# Altium PCB Carrier_I.PcbDoc
Units mm, origin at the board's own origin, x right, y up, seen from the top; angles counter-clockwise.
Board outline 90 x 90 mm, 2 copper layers (Top Layer, Bottom Layer); 8 components, 0 nets, 224 pads, 112 vias.
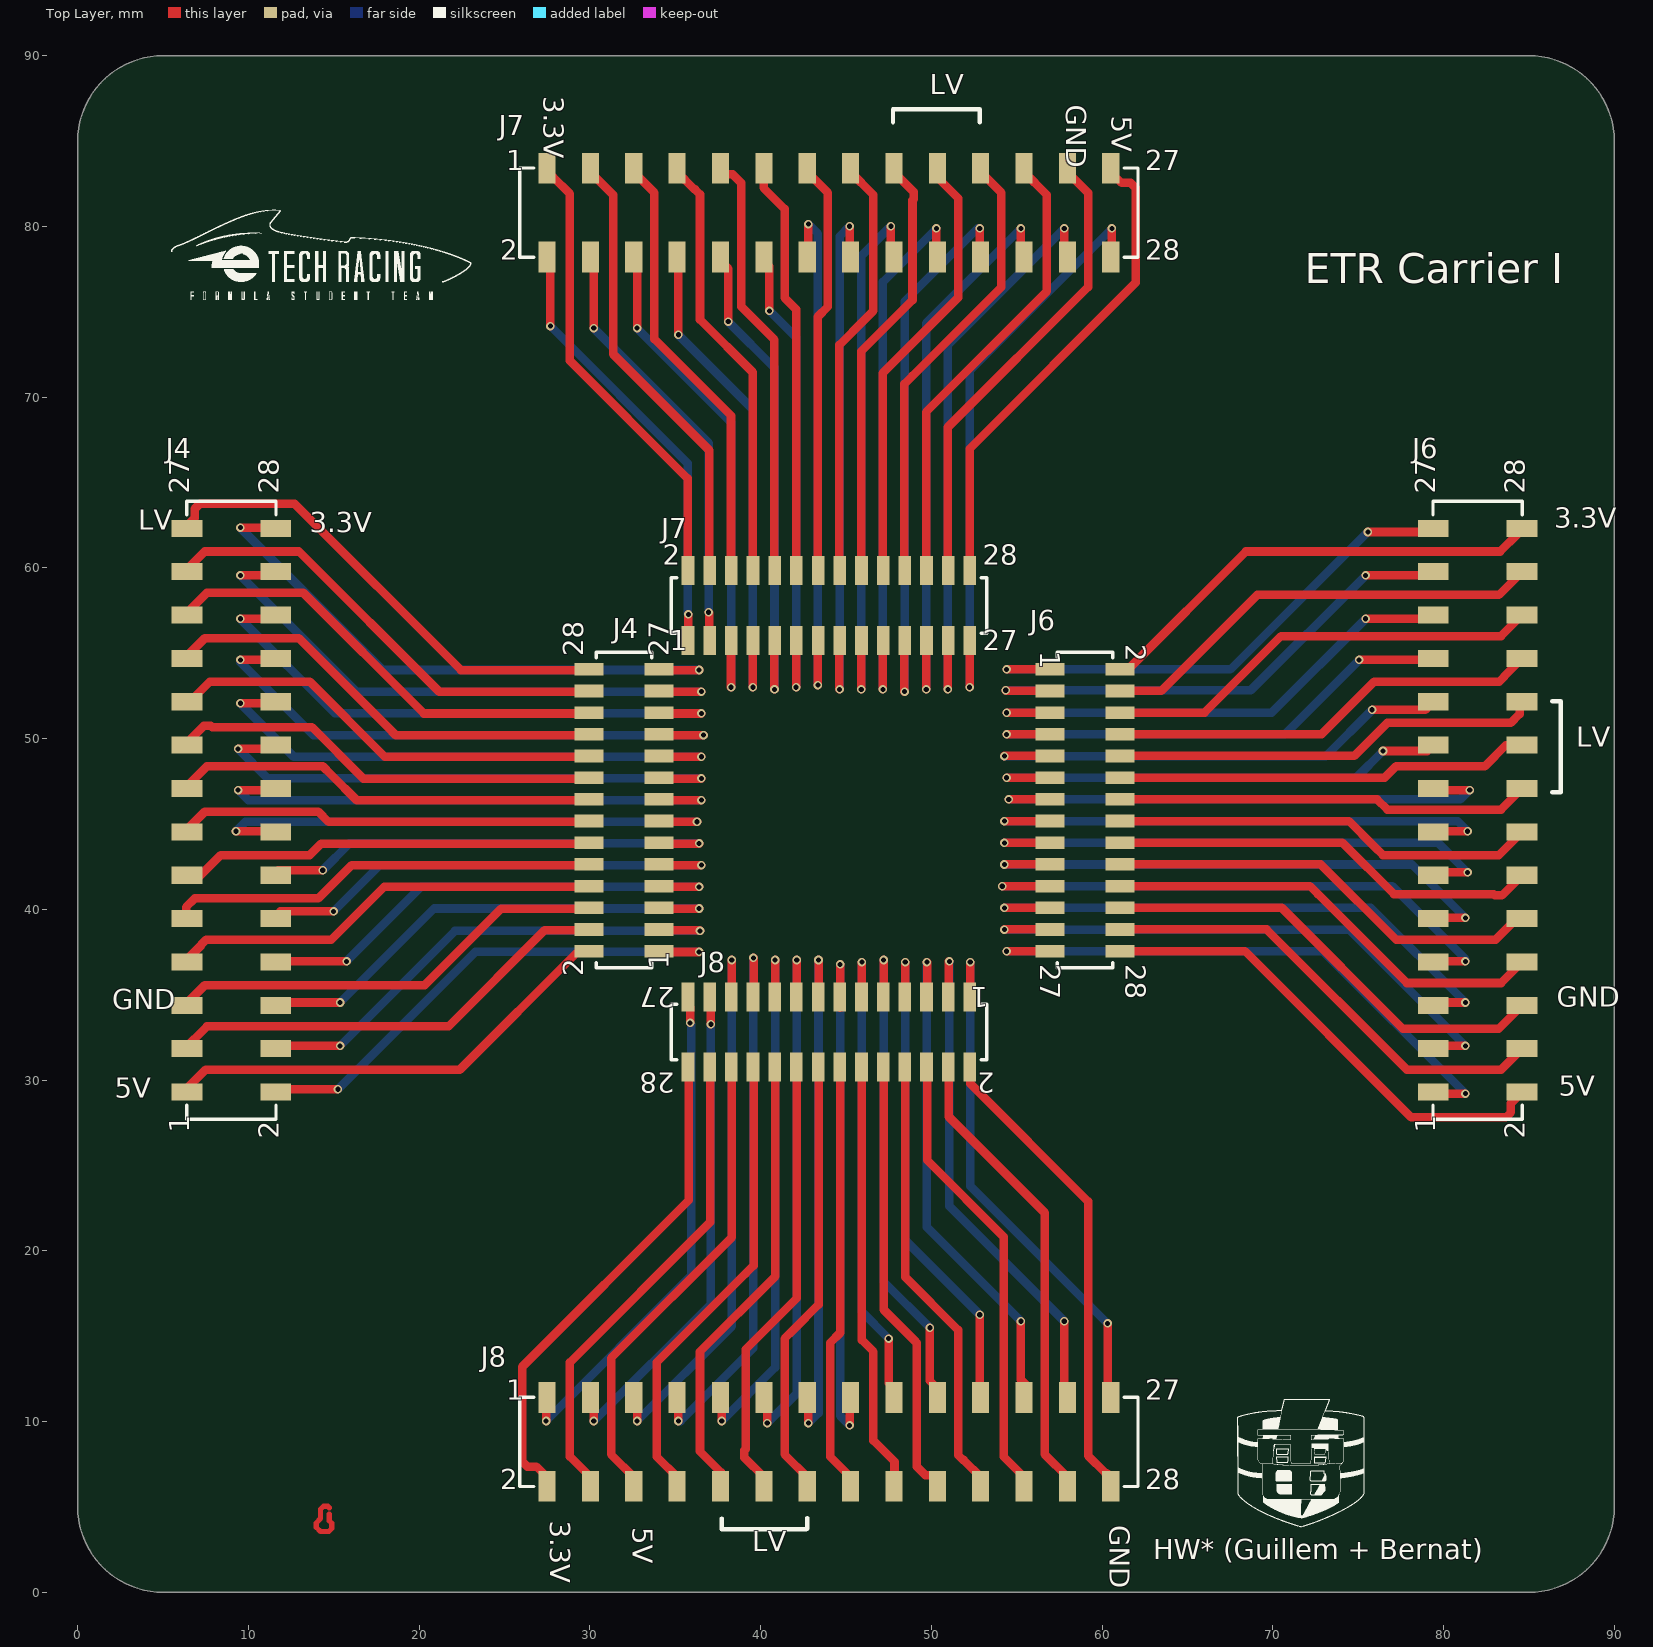
[diagram p0: Top Layer view]
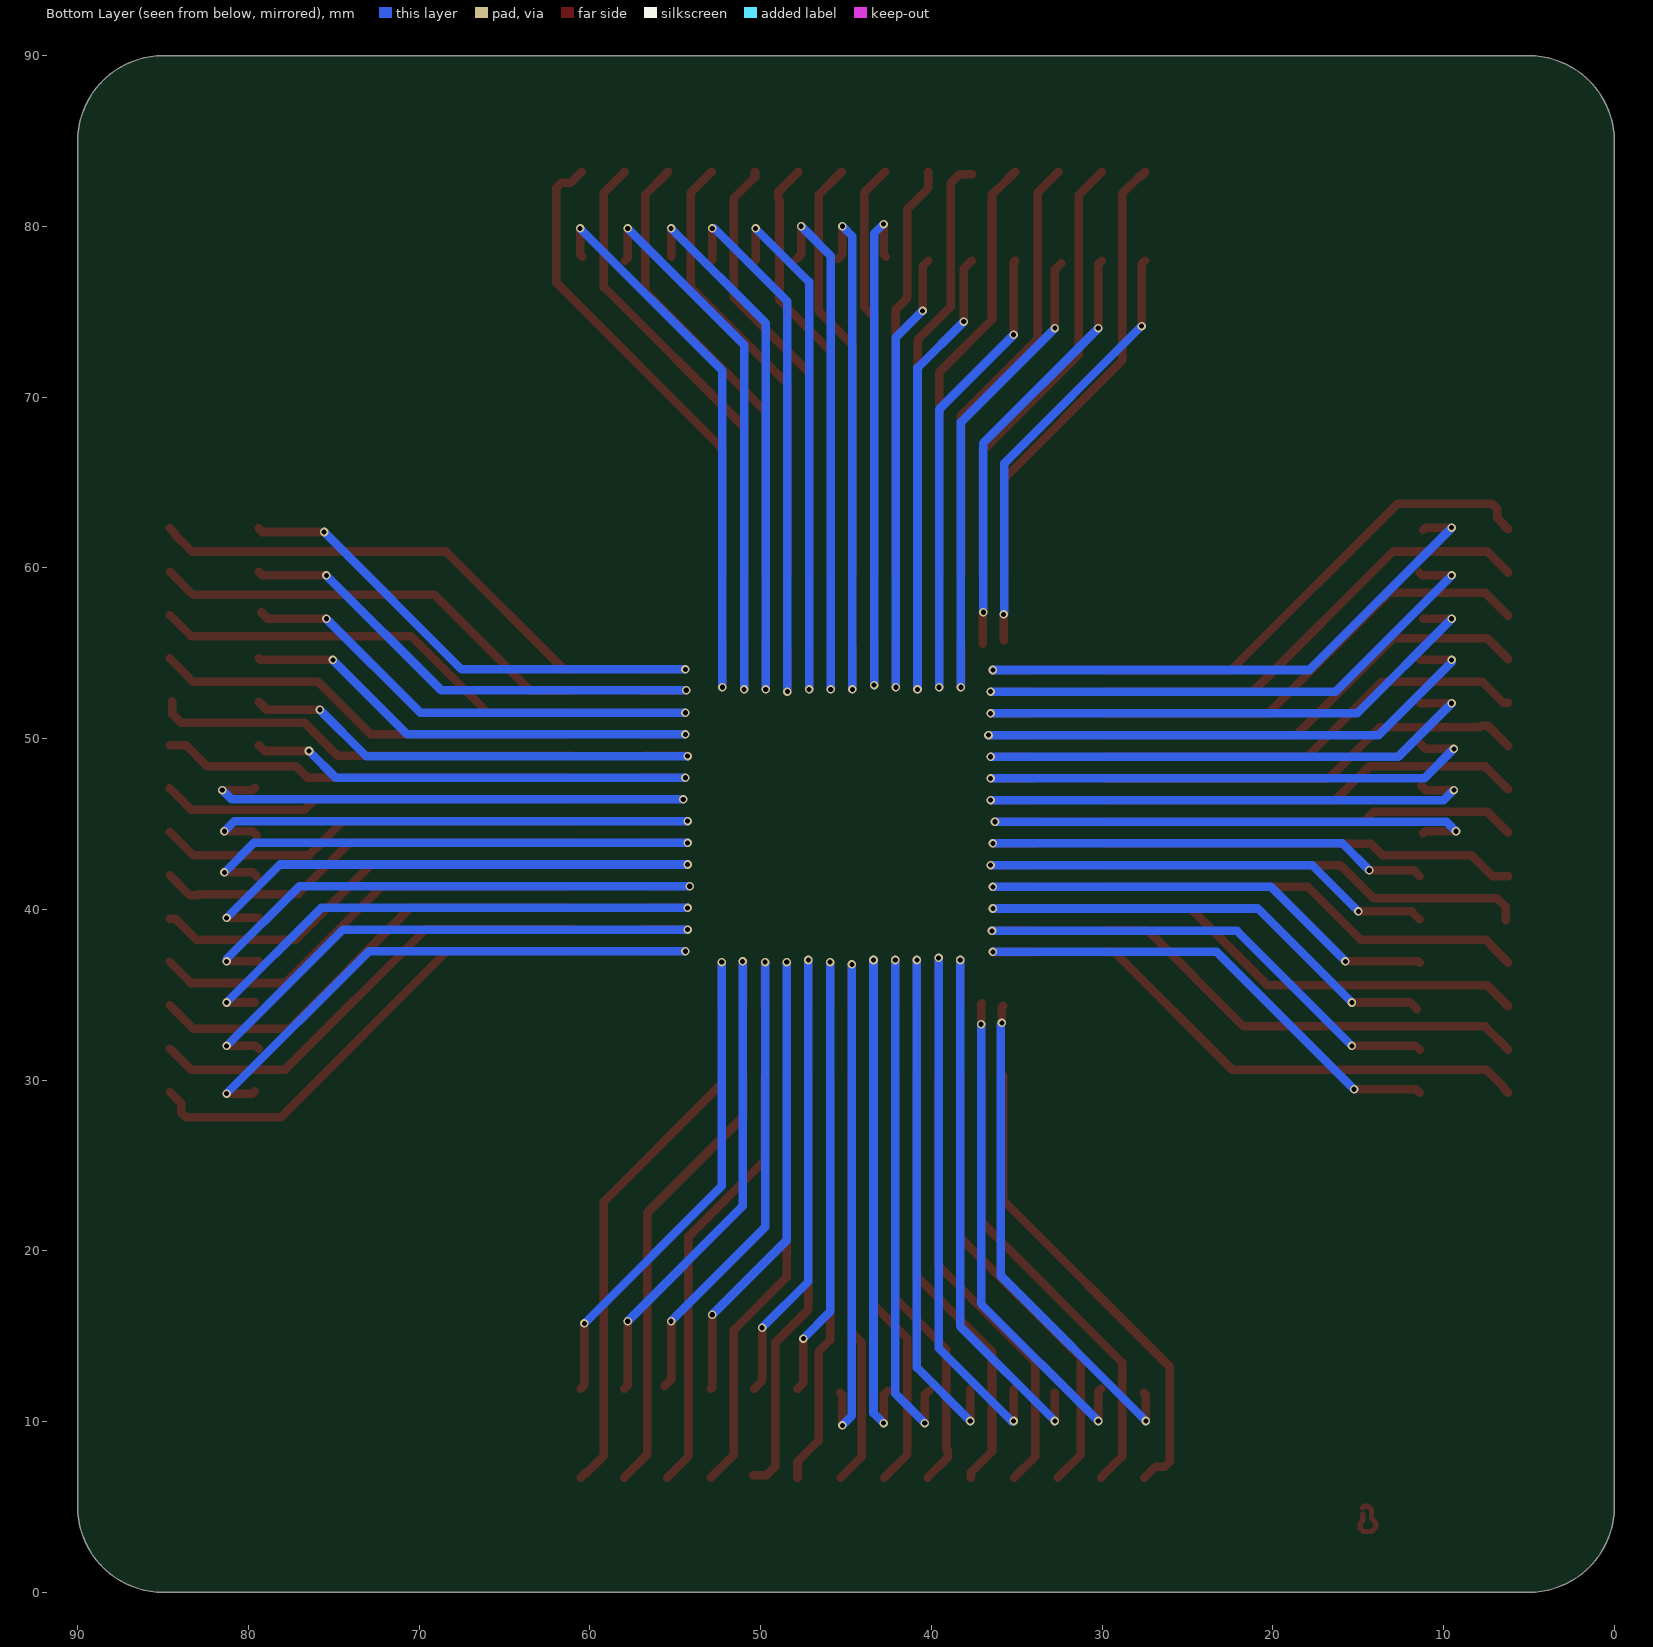
[diagram p1: Bottom Layer view, seen from below]

## Layer stack, top to bottom
Top Solder: solder mask 0.0102, Solder Resist, Dk 3.5
Top Layer: signal copper 0.0356
Dielectric 1: dielectric 0.32, FR-4, Dk 4.8
Bottom Layer: signal copper 0.0356
Bottom Solder: solder mask 0.0102, Solder Resist, Dk 3.5

## Board outline
0,5 0,85 cw(c5,85) 5,90 85,90 cw(c85,85) 90,85 90,5 cw(c85,5) 85,0 5,0 cw(c5,5)

## Design rules (kind name [scope] priority, off if disabled: settings)
Clearance [All] p1: gap=0.2 ignorepadtopadclearanceinfootprint=FALSE
HoleSize [All] p1: absolutevalues=TRUE maxlimit=5 minlimit=0.2 maxpercent=80.000 minpercent=20.000
PolygonConnect [All] p1: connectstyle=Relief reliefconductorwidth=0.254 reliefentries=4 polygonreliefangle="90 Angle" airgapwidth=0.254
RoutingVias [All] p1: holewidth=0.3 width=0.5 viastyle="Through Hole" minholewidth=0.2 minwidth=0.3 maxholewidth=1 maxwidth=1
ShortCircuit [All] p1: allowed=TRUE
SolderMaskExpansion [All] p1: expansion=0.102 istentingtop=FALSE
Width [All] p1: maxlimit=5 minlimit=0.3 preferedwidth=0.5
28 further rules are at their usual default settings.

## Components (designator, comment, footprint, x,y, rotation, side; value= is the part's Value field where it differs from the comment)
J4 "Comment" 62332821021 31.999,45.809 r90 top
J4 "Comment" 61002821821 8.999,45.809 r90 top
J6 "Comment" 62332821021 58.999,45.809 r270 top
J6 "Comment" 61002821821 81.999,45.809 r90 top
J7 "Comment" 62332821021 43.999,57.809 r0 top
J7 "Comment" 61002821821 43.999,80.809 r0 top
J8 "Comment" 62332821021 43.999,32.809 r180 top
J8 "Comment" 61002821821 43.999,8.809 r0 top

## Footprints (in the part's own frame and the unit in brackets; to place one, negate y for a bottom-side part, rotate by r counter-clockwise, add the part's x,y. Pads: shape width x height; smd on the part's side, far side on the other; paste and mask are expansions set on the pad)
61002821821 [mm] "Socket Header, Pitch 2.54 mm, SMT, Vertical, dual row, 28p"
  rect 1x1.8 smd: 1(-16.51,2.6) 2(-16.51,-2.6) 3(-13.97,2.6) 4(-13.97,-2.6) 5(-11.43,2.6) 6(-11.43,-2.6) 7(-8.89,2.6) 8(-8.89,-2.6) 9(-6.35,2.6) 10(-6.35,-2.6) 11(-3.81,2.6) 12(-3.81,-2.6) 13(-1.27,2.6) 14(-1.27,-2.6) 15(1.27,2.6) 16(1.27,-2.6) 17(3.81,2.6) 18(3.81,-2.6) 19(6.35,2.6) 20(6.35,-2.6) 21(8.89,2.6) 22(8.89,-2.6) 23(11.43,2.6) 24(11.43,-2.6) 25(13.97,2.6) 26(13.97,-2.6) 27(16.51,2.6) 28(16.51,-2.6)
  silkscreen extent -18.11,-2.62 18.11,2.62, body extent -17.78,-3.35 17.78,3.35, height 8.5
62332821021 [mm] "Socket Header, Pitch 1.27 mm, SMT, Vertical, dual row, 28p"
  rect 0.74x1.7 smd: 1(-8.255,-2.05) 2(-8.255,2.05) 3(-6.985,-2.05) 4(-6.985,2.05) 5(-5.715,-2.05) 6(-5.715,2.05) 7(-4.445,-2.05) 8(-4.445,2.05) 9(-3.175,-2.05) 10(-3.175,2.05) 11(-1.905,-2.05) 12(-1.905,2.05) 13(-0.635,-2.05) 14(-0.635,2.05) 15(0.635,-2.05) 16(0.635,2.05) 17(1.905,-2.05) 18(1.905,2.05) 19(3.175,-2.05) 20(3.175,2.05) 21(4.445,-2.05) 22(4.445,2.05) 23(5.715,-2.05) 24(5.715,2.05) 25(6.985,-2.05) 26(6.985,2.05) 27(8.255,-2.05) 28(8.255,2.05)
  silkscreen extent -9.24,-1.62 9.24,1.63, body extent -9.09,-2.3 9.09,2.3, height 4.69

## Via types
v1: diameter 0.5, hole 0.3, Top Layer to Bottom Layer, 112 vias

## Nets (pads, with @x,y where several pads share a name; then routed paths per layer and width w, separated by ;. In a path a pad name is that pad's centre, name@x,y a point inside that pad or via, vN(x,y) a via of type N, cw(c..) or ccw(c..) an arc to the next point about the centre after c; other vN are vias at no path point)
pads on no net: J4.1 J4.2 J4.3 J4.4 J4.5 J4.6 J4.7 J4.8 J4.9 J4.10 J4.11 J4.12 J4.13 J4.14 J4.15 J4.16 J4.17 J4.18 J4.19 J4.20 J4.21 J4.22 J4.23 J4.24 J4.25 J4.26 J4.27 J4.28 J6.1 J6.2 J6.3 J6.4 J6.5 J6.6 J6.7 J6.8 J6.9 J6.10 J6.11 J6.12 J6.13 J6.14 J6.15 J6.16 J6.17 J6.18 J6.19 J6.20 J6.21 J6.22 J6.23 J6.24 J6.25 J6.26 J6.27 J6.28 J7.1 J7.2 J7.3 J7.4 J7.5 J7.6 J7.7 J7.8 J7.9 J7.10 J7.11 J7.12 J7.13 J7.14 J7.15 J7.16 J7.17 J7.18 J7.19 J7.20 J7.21 J7.22 J7.23 J7.24 J7.25 J7.26 J7.27 J7.28 J8.1 J8.2 J8.3 J8.4 J8.5 J8.6 J8.7 J8.8 J8.9 J8.10 J8.11 J8.12 J8.13 J8.14 J8.15 J8.16 J8.17 J8.18 J8.19 J8.20 J8.21 J8.22 J8.23 J8.24 J8.25 J8.26 J8.27 J8.28
copper on no net: | length 3211
  Top Layer w0.3: 14.732,4.572 14.732,4.191 14.882,4.041 14.882,3.732 14.706,3.556 14.224,3.556 13.97,3.81 13.97,4.064 14.224,4.318 14.224,4.861 14.4,5.037 14.648,5.037 14.732,4.953
  Top Layer w0.5: 6.206,29.248 6.477,29.519 6.477,29.591 7.493,30.607 8.636,30.607 22.38,30.607 29.276,37.503 29.756,37.503 ; 6.206,31.788 7.565,33.147 21.717,33.147 27.343,38.773 29.756,38.773 ; 6.206,34.328 7.438,35.56 20.32,35.56 24.803,40.043 29.756,40.043 ; 6.206,36.868 7.239,37.901 7.239,37.934 7.532,38.227 14.859,38.227 17.945,41.313 29.756,41.313 ; 6.206,41.948 7.15,41.948 8.382,43.18 13.589,43.18 14.262,43.853 29.756,43.853 ; 6.206,44.488 7.438,45.72 8.128,45.72 14.097,45.72 14.694,45.123 29.756,45.123 ; 6.206,47.028 7.565,48.387 8.763,48.387 14.351,48.387 14.859,47.879 16.345,46.393 29.756,46.393 ; 6.206,49.568 7.385,50.747 7.8,50.747 7.874,50.673 13.716,50.673 16.726,47.663 29.756,47.663 ; 6.206,52.108 6.515,52.108 7.747,53.34 13.589,53.34 17.996,48.933 29.756,48.933 ; 6.206,54.648 7.438,55.88 12.954,55.88 18.161,50.673 18.631,50.203 29.756,50.203 ; 6.206,57.188 7.565,58.547 13.208,58.547 20.282,51.473 29.756,51.473 ; 6.206,59.728 7.438,60.96 12.954,60.96 21.171,52.743 29.756,52.743 ; 6.206,62.268 6.858,62.92 6.858,63.461 7.151,63.754 12.7,63.754 22.441,54.013 29.756,54.013 ; 6.35,39.37 6.35,40.132 6.858,40.64 14.097,40.64 14.224,40.767 16.04,42.583 29.756,42.583 ; v1(9.271,44.577) 11.049,44.577 11.176,44.45 ; v1(9.398,46.99) 10.922,46.99 11.049,46.99 11.303,47.244 ; v1(9.398,49.403) 11.049,49.403 11.303,49.657 ; v1(9.525,52.07) 11.368,52.07 11.406,52.108 ; v1(9.525,54.61) 11.368,54.61 11.406,54.648 ; v1(9.525,57.023) 11.176,57.023 ; v1(9.525,59.563) 11.241,59.563 11.406,59.728 ; v1(9.525,62.357) 11.049,62.357 11.176,62.23 ; 11.406,29.248 11.622,29.464 v1(15.24,29.464) ; 11.406,31.788 11.622,32.004 v1(15.367,32.004) ; 11.406,36.868 11.495,36.957 v1(15.748,36.957) ; 11.406,39.408 11.876,39.878 v1(14.986,39.878) ; 11.406,41.948 11.749,42.291 v1(14.351,42.291) ; 11.557,34.163 11.938,34.544 v1(15.367,34.544) ; v1(27.432,10.033) 27.432,11.557 27.559,11.684 ; 27.47,78.002 27.686,77.786 v1(27.686,74.168) ; 27.47,83.202 27.741,82.931 27.813,82.931 28.829,81.915 28.829,80.772 28.829,72.136 35.725,65.24 35.725,59.652 ; 27.521,6.714 26.869,7.366 26.328,7.366 26.035,7.659 26.035,13.208 35.776,22.949 35.776,30.264 ; 30.01,78.002 30.226,77.786 v1(30.226,74.041) ; 30.01,83.202 31.369,81.843 31.369,72.517 36.995,66.891 36.995,59.652 ; 30.061,6.714 28.829,7.946 28.829,13.462 37.046,21.679 37.046,30.264 ; 30.061,11.914 30.226,11.749 v1(30.226,10.033) ; 32.385,77.851 32.766,77.47 v1(32.766,74.041) ; 32.55,83.202 33.782,81.97 33.782,73.406 38.265,68.923 38.265,59.652 ; 32.601,6.714 31.242,8.073 31.242,13.716 38.316,20.79 38.316,30.264 ; v1(32.766,10.033) 32.766,11.684 ; 33.729,45.123 36.272,45.123 v1(36.272,45.13) ; 33.856,37.503 36.399,37.503 v1(36.399,37.51) ; 33.856,38.773 36.411,38.773 cw(c36.411,38.735) v1(36.449,38.735) ; 33.856,40.043 36.399,40.043 v1(36.399,40.05) ; 33.856,41.313 36.399,41.313 v1(36.399,41.32) ; 33.856,43.853 36.399,43.853 v1(36.399,43.86) ; 33.856,54.013 36.399,54.013 v1(36.399,54.02) ; 33.983,42.583 36.526,42.583 v1(36.526,42.59) ; 33.983,46.393 36.526,46.393 v1(36.526,46.4) ; 33.983,47.663 36.526,47.663 v1(36.526,47.67) ; 33.983,48.933 36.526,48.933 v1(36.526,48.94) ; 33.983,51.473 36.526,51.473 v1(36.526,51.48) ; 33.983,52.743 36.526,52.743 v1(36.526,52.75) ; 34.11,50.203 36.653,50.203 v1(36.653,50.21) ; 35.09,78.002 35.179,77.913 v1(35.179,73.66) ; 35.09,83.202 36.123,82.169 36.156,82.169 36.449,81.876 36.449,74.549 39.535,71.463 39.535,59.652 ; 35.141,6.714 33.909,7.946 33.909,13.462 39.116,18.669 39.586,19.139 39.586,30.264 ; 35.141,11.914 35.179,11.876 v1(35.179,10.033) ; 35.744,55.759 35.771,55.786 v1(35.771,57.279) ; 35.776,34.364 35.864,34.276 v1(35.864,33.351) ; v1(36.957,57.404) 36.995,57.366 36.995,55.552 ; 37.046,34.491 37.084,34.453 v1(37.084,33.274) ; 37.592,83.058 38.354,83.058 38.862,82.55 38.862,75.311 38.989,75.184 40.805,73.368 40.805,59.652 ; 37.63,78.002 38.1,77.532 v1(38.1,74.422) ; 37.681,6.714 37.681,7.023 36.449,8.255 36.449,14.097 40.856,18.504 40.856,30.264 ; 37.681,11.914 37.719,11.876 v1(37.719,10.033) ; 38.265,55.552 38.265,53.009 v1(38.272,53.009) ; v1(38.309,37.034) 38.316,37.034 38.316,34.491 ; 39.535,55.552 39.535,53.009 v1(39.542,53.009) ; v1(39.579,37.161) 39.586,37.161 39.586,34.618 ; 40.132,11.811 40.386,11.557 v1(40.386,9.906) ; 40.17,78.002 40.513,77.659 v1(40.513,75.057) ; 40.17,83.202 40.17,82.258 41.402,81.026 41.402,75.819 42.075,75.146 42.075,59.652 ; 40.221,6.714 39.042,7.893 39.042,8.308 39.116,8.382 39.116,14.224 42.126,17.234 42.126,30.264 ; 40.805,55.425 40.805,52.882 v1(40.812,52.882) ; v1(40.849,37.034) 40.856,37.034 40.856,34.491 ; 42.075,55.552 42.075,53.009 v1(42.082,53.009) ; v1(42.119,37.034) 42.126,37.034 42.126,34.491 ; 42.545,11.811 42.799,11.557 42.799,11.43 v1(42.799,9.906) ; 42.672,78.232 42.799,78.359 v1(42.799,80.137) ; 42.71,83.202 43.942,81.97 43.942,81.28 43.942,75.311 43.345,74.714 43.345,59.652 ; 42.761,6.714 41.402,8.073 41.402,9.271 41.402,14.859 41.91,15.367 43.396,16.853 43.396,30.264 ; 43.345,55.679 43.345,53.136 v1(43.352,53.136) ; v1(43.389,37.034) 43.396,37.034 43.396,34.491 ; 44.615,55.425 44.615,52.882 v1(44.622,52.882) ; 44.615,59.652 44.615,73.063 46.101,74.549 46.609,75.057 46.609,80.645 46.609,81.843 45.25,83.202 ; v1(44.659,36.78) 44.666,36.78 44.666,34.237 ; 44.666,30.264 44.666,15.202 44.069,14.605 44.069,8.636 44.069,7.946 45.301,6.714 ; v1(45.212,9.779) 45.212,11.557 45.339,11.684 ; v1(45.212,80.01) 45.212,78.486 45.212,78.359 45.466,78.105 ; 45.885,55.425 45.885,52.882 v1(45.892,52.882) ; 45.885,59.652 45.885,72.682 48.895,75.692 48.895,81.534 48.969,81.608 48.969,82.023 47.79,83.202 ; v1(45.929,36.907) 45.936,36.907 45.936,34.364 ; 45.936,30.264 45.936,14.77 46.609,14.097 46.609,8.89 47.841,7.658 47.841,6.714 ; 47.155,55.425 47.155,52.882 v1(47.162,52.882) ; 47.155,59.652 47.155,71.412 51.562,75.819 51.562,81.661 50.33,82.893 50.33,83.202 ; v1(47.199,37.034) 47.206,37.034 47.206,34.491 ; 47.206,30.264 47.206,16.548 49.022,14.732 49.149,14.605 49.149,7.366 49.657,6.858 50.419,6.858 ; v1(47.498,14.859) 47.498,12.257 47.841,11.914 ; v1(47.625,80.01) 47.625,78.359 47.879,78.105 ; 48.425,55.298 48.425,52.755 v1(48.432,52.755) ; 48.425,59.652 48.425,70.777 48.895,71.247 54.102,76.454 54.102,81.97 52.87,83.202 ; v1(48.469,36.907) 48.476,36.907 48.476,34.364 ; 48.476,30.264 48.476,18.453 51.562,15.367 51.562,8.04 51.855,7.747 51.888,7.747 52.921,6.714 ; 49.695,55.425 49.695,52.882 v1(49.702,52.882) ; 49.695,59.652 49.695,69.126 56.769,76.2 56.769,81.843 55.41,83.202 ; v1(49.739,36.907) 49.746,36.907 49.746,34.364 ; 49.746,30.264 49.746,25.311 54.229,20.828 54.229,7.946 55.461,6.714 ; v1(49.911,15.494) 49.911,12.384 50.381,11.914 ; v1(50.292,79.883) 50.292,78.04 50.33,78.002 ; 50.965,55.425 50.965,52.882 v1(50.972,52.882) ; 50.965,59.652 50.965,68.237 59.182,76.454 59.182,81.97 57.95,83.202 ; 51.016,30.264 51.016,27.851 56.642,22.225 56.642,8.073 58.001,6.714 ; 51.016,34.364 51.016,36.919 cw(c51.054,36.919) v1(51.054,36.957) ; 52.235,55.552 52.235,53.009 v1(52.242,53.009) ; 52.235,59.652 52.235,66.967 61.976,76.708 61.976,82.257 61.683,82.55 61.142,82.55 60.49,83.202 ; v1(52.279,36.907) 52.286,36.907 52.286,34.364 ; 52.286,30.264 52.286,29.784 59.182,22.888 59.182,9.144 59.182,8.001 60.198,6.985 60.27,6.985 60.541,6.714 ; v1(52.832,16.256) 52.832,12.003 52.921,11.914 ; v1(52.832,79.883) 52.832,78.04 52.87,78.002 ; v1(54.152,41.357) 54.152,41.364 56.695,41.364 ; v1(54.279,38.817) 54.279,38.824 56.822,38.824 ; v1(54.279,40.087) 54.279,40.094 56.822,40.094 ; v1(54.279,42.627) 54.279,42.634 56.822,42.634 ; v1(54.279,43.897) 54.279,43.904 56.822,43.904 ; v1(54.279,45.167) 54.279,45.174 56.822,45.174 ; v1(54.279,48.977) 54.279,48.984 56.822,48.984 ; v1(54.356,52.832) ccw(c54.394,52.832) 54.394,52.794 56.949,52.794 ; v1(54.406,37.547) 54.406,37.554 56.949,37.554 ; v1(54.406,47.707) 54.406,47.714 56.949,47.714 ; v1(54.406,50.247) 54.406,50.254 56.949,50.254 ; v1(54.406,51.517) 54.406,51.524 56.949,51.524 ; v1(54.406,54.057) 54.406,54.064 56.949,54.064 ; v1(54.533,46.437) 54.533,46.444 57.076,46.444 ; v1(55.245,15.875) 55.245,12.446 55.626,12.065 ; 55.245,78.232 v1(55.245,79.883) ; v1(57.785,15.875) 57.785,12.13 58.001,11.914 ; v1(57.785,79.883) 57.785,78.167 57.95,78.002 ; v1(60.325,15.748) 60.325,12.13 60.541,11.914 ; 60.452,78.232 60.579,78.359 v1(60.579,79.883) ; 61.049,37.554 68.364,37.554 78.105,27.813 83.654,27.813 83.947,28.106 83.947,28.647 84.599,29.299 ; 61.049,38.824 69.634,38.824 77.851,30.607 83.367,30.607 84.599,31.839 ; 61.049,40.094 70.523,40.094 77.597,33.02 83.24,33.02 84.599,34.379 ; 61.049,41.364 72.174,41.364 72.644,40.894 77.851,35.687 83.367,35.687 84.599,36.919 ; 61.049,42.634 72.809,42.634 77.216,38.227 83.058,38.227 84.29,39.459 84.599,39.459 ; 61.049,43.904 74.079,43.904 77.089,40.894 82.931,40.894 83.005,40.82 83.42,40.82 84.599,41.999 ; 61.049,45.174 74.46,45.174 75.946,43.688 76.454,43.18 82.042,43.18 83.24,43.18 84.599,44.539 ; 61.049,46.444 76.111,46.444 76.708,45.847 82.677,45.847 83.367,45.847 84.599,47.079 ; 61.049,47.714 76.543,47.714 77.216,48.387 82.423,48.387 83.655,49.619 84.599,49.619 ; 61.049,48.984 74.765,48.984 76.581,50.8 76.708,50.927 83.947,50.927 84.455,51.435 84.455,52.197 ; 61.049,50.254 72.86,50.254 75.946,53.34 83.273,53.34 83.566,53.633 83.566,53.666 84.599,54.699 ; 61.049,51.524 66.002,51.524 70.485,56.007 83.367,56.007 84.599,57.239 ; 61.049,52.794 63.462,52.794 69.088,58.42 83.24,58.42 84.599,59.779 ; 61.049,54.064 61.529,54.064 68.425,60.96 82.169,60.96 83.312,60.96 84.328,61.976 84.328,62.048 84.599,62.319 ; v1(75.057,54.61) 79.31,54.61 79.399,54.699 ; v1(75.438,57.023) 78.867,57.023 79.248,57.404 ; v1(75.438,59.563) 79.183,59.563 79.399,59.779 ; v1(75.565,62.103) 79.183,62.103 79.399,62.319 ; v1(75.819,51.689) 78.929,51.689 79.399,52.159 ; v1(76.454,49.276) 79.056,49.276 79.399,49.619 ; 79.399,31.839 79.564,32.004 v1(81.28,32.004) ; 79.399,36.919 79.437,36.957 v1(81.28,36.957) ; 79.399,39.459 79.437,39.497 v1(81.28,39.497) ; 79.502,41.91 79.756,42.164 v1(81.407,42.164) ; 79.502,44.323 79.756,44.577 79.883,44.577 v1(81.407,44.577) ; 79.629,29.337 79.756,29.21 v1(81.28,29.21) ; 79.629,34.544 v1(81.28,34.544) ; 79.629,47.117 79.756,46.99 v1(81.534,46.99)
  Bottom Layer w0.5: v1(9.271,44.577) 9.824,45.13 v1(36.272,45.13) ; v1(9.398,46.99) 9.988,46.4 v1(36.526,46.4) ; v1(9.398,49.403) 11.131,47.67 v1(36.526,47.67) ; v1(9.525,52.07) 12.655,48.94 v1(36.526,48.94) ; v1(9.525,54.61) 9.525,54.483 13.798,50.21 v1(36.653,50.21) ; v1(9.525,57.023) 15.068,51.48 v1(36.526,51.48) ; v1(9.525,59.563) 16.338,52.75 v1(36.526,52.75) ; v1(9.525,62.357) 17.862,54.02 v1(36.399,54.02) ; v1(14.351,42.291) 15.92,43.86 v1(36.399,43.86) ; v1(14.986,39.878) 17.698,42.59 v1(36.526,42.59) ; v1(15.24,29.464) 23.286,37.51 v1(36.399,37.51) ; v1(15.367,32.004) 22.098,38.735 v1(36.449,38.735) ; v1(15.367,34.544) 20.873,40.05 v1(36.399,40.05) ; v1(15.748,36.957) 20.111,41.32 v1(36.399,41.32) ; v1(27.432,10.033) 35.941,18.542 35.941,32.101 35.941,33.274 v1(35.864,33.351) ; v1(27.686,74.168) 35.732,66.122 35.732,57.404 35.732,57.318 v1(35.771,57.279) ; v1(30.226,10.033) 37.084,16.891 v1(37.084,33.274) ; v1(30.226,74.041) 36.957,67.31 v1(36.957,57.404) ; v1(32.766,10.033) 38.309,15.576 v1(38.309,37.034) ; v1(32.766,74.041) 38.272,68.535 v1(38.272,53.009) ; v1(35.179,10.033) 35.306,10.033 39.579,14.306 v1(39.579,37.161) ; v1(35.179,73.66) 39.542,69.297 v1(39.542,53.009) ; v1(37.719,10.033) 40.849,13.163 v1(40.849,37.034) ; v1(38.1,74.422) 40.812,71.71 v1(40.812,52.882) ; v1(40.386,9.906) 42.119,11.639 v1(42.119,37.034) ; v1(40.513,75.057) 42.082,73.488 v1(42.082,53.009) ; v1(42.799,9.906) 43.389,10.496 v1(43.389,37.034) ; v1(42.799,80.137) 43.352,79.584 v1(43.352,53.136) ; v1(44.622,52.882) 44.622,79.42 v1(45.212,80.01) ; v1(44.659,36.78) 44.659,10.332 v1(45.212,9.779) ; v1(45.892,52.882) 45.892,78.277 v1(47.625,80.01) ; v1(45.929,36.907) 45.929,16.428 v1(47.498,14.859) ; v1(47.162,52.882) 47.162,76.753 v1(50.292,79.883) ; v1(47.199,37.034) 47.199,18.206 v1(49.911,15.494) ; v1(48.432,52.755) 48.432,75.61 52.705,79.883 v1(52.832,79.883) ; v1(48.469,36.907) 48.469,20.619 v1(52.832,16.256) ; v1(49.702,52.882) 49.702,74.34 v1(55.245,79.883) ; v1(49.739,36.907) 49.739,21.381 v1(55.245,15.875) ; v1(50.972,52.882) 50.972,73.07 v1(57.785,79.883) ; v1(51.054,36.957) 51.054,22.606 v1(57.785,15.875) ; v1(52.242,53.009) 52.242,71.546 v1(60.579,79.883) ; v1(52.279,36.907) 52.279,23.794 v1(60.325,15.748) ; v1(54.152,41.357) 77.007,41.357 81.28,37.084 v1(81.28,36.957) ; v1(54.279,38.817) 74.467,38.817 v1(81.28,32.004) ; v1(54.279,40.087) 75.737,40.087 v1(81.28,34.544) ; v1(54.279,42.627) 78.15,42.627 v1(81.28,39.497) ; v1(54.279,43.897) 79.674,43.897 v1(81.407,42.164) ; v1(54.279,45.167) 80.817,45.167 v1(81.407,44.577) ; v1(54.279,48.977) 73.107,48.977 v1(75.819,51.689) ; v1(54.356,52.832) 68.707,52.832 v1(75.438,59.563) ; v1(54.406,37.547) 72.943,37.547 v1(81.28,29.21) ; v1(54.406,47.707) 74.885,47.707 v1(76.454,49.276) ; v1(54.406,50.247) 70.694,50.247 v1(75.057,54.61) ; v1(54.406,51.517) 69.932,51.517 v1(75.438,57.023) ; v1(54.406,54.057) 67.519,54.057 v1(75.565,62.103) ; v1(54.533,46.437) 80.981,46.437 v1(81.534,46.99)

## Silkscreen, mask and mechanical layers (free items; w line width, h text height)
Top Overlay:
  drawing of 49 lines, arcs and shapes, not listed
  text "3.3V" at 26.924,87.63 h2 r270
  text "LV" at 49.913,87.376 h2
  text "GND" at 57.531,87.12 h2 r270
  text "5V" at 60.198,86.487 h2 r270
  text "ETR Carrier I" at 71.885,76.073 h3
  text "3.3V" at 86.487,61.976 h2
  text "LV" at 3.558,61.849 h2
  text "3.3V" at 13.589,61.722 h2
  text "LV" at 87.759,49.149 h2
  text "GND" at 86.616,33.909 h2
  text "GND" at 2.034,33.782 h2
  text "5V" at 86.741,28.702 h2
  text "5V" at 2.159,28.575 h2
  text "3.3V" at 27.305,4.191 h2 r270
  text "GND" at 60.071,3.935 h2 r270
  text "5V" at 32.131,3.81 h2 r270
  text "LV" at 39.499,2.032 h2
  text "HW* (Guillem + Bernat)" at 62.994,1.556 h2
Mechanical 1:
  the board outline again, w0.254

## Text inside footprints (layer, text, board x,y; h text height)
J4: Top Overlay "2" at 29.999,36.089 h2 r90; Top Overlay "1" at 34.999,36.489 h2 r90; Top Overlay "27" at 34.999,54.829 h2 r90; Top Overlay "28" at 29.999,54.829 h2 r90
J4: Top Overlay "1" at 6.899,26.919 h2 r90; Top Overlay "2" at 12.149,26.569 h2 r90; Top Overlay "27" at 6.899,64.349 h2 r90; Top Overlay "28" at 12.149,64.349 h2 r90
J6: Top Overlay "28" at 60.999,36.789 h2 r270; Top Overlay "27" at 55.999,36.789 h2 r270; Top Overlay "1" at 55.999,55.129 h2 r270; Top Overlay "2" at 60.999,55.529 h2 r270
J6: Top Overlay "1" at 79.899,26.919 h2 r90; Top Overlay "2" at 85.149,26.569 h2 r90; Top Overlay "27" at 79.899,64.349 h2 r90; Top Overlay "28" at 85.149,64.349 h2 r90
J7: Top Overlay "28" at 53.019,59.809 h2; Top Overlay "27" at 53.019,54.809 h2; Top Overlay "1" at 34.679,54.809 h2; Top Overlay "2" at 34.279,59.809 h2
J7: Top Overlay "28" at 62.539,77.659 h2; Top Overlay "27" at 62.539,82.909 h2; Top Overlay "2" at 24.759,77.659 h2; Top Overlay "1" at 25.109,82.909 h2
J8: Top Overlay "1" at 25.109,10.909 h2; Top Overlay "2" at 24.759,5.659 h2; Top Overlay "27" at 62.539,10.909 h2; Top Overlay "28" at 62.539,5.659 h2
J8: Top Overlay "2" at 53.719,30.809 h2 r180; Top Overlay "1" at 53.319,35.809 h2 r180; Top Overlay "27" at 34.979,35.809 h2 r180; Top Overlay "28" at 34.979,30.809 h2 r180